# EAGLE board untitled (EAGLE 6.1)
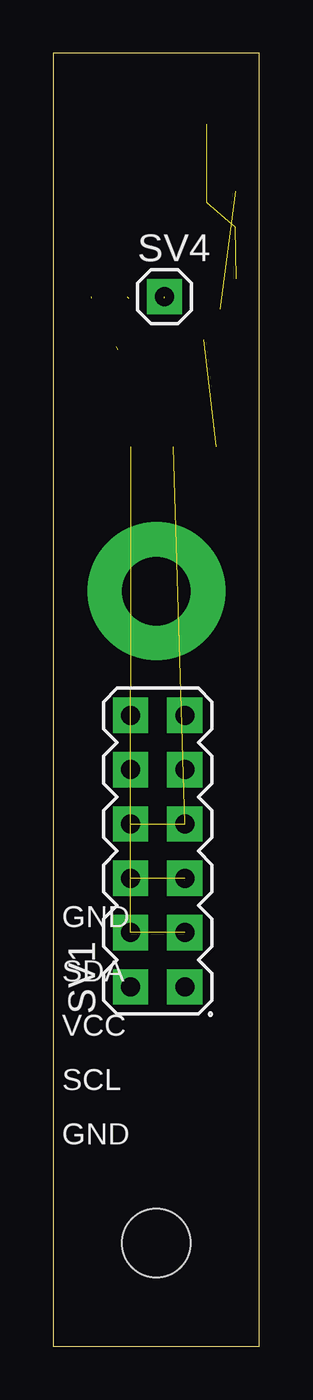
[diagram p0: board, top side]
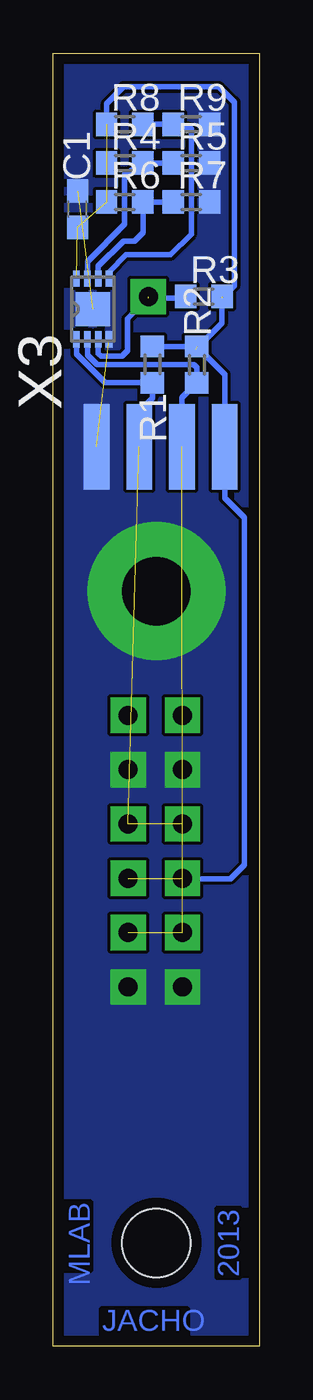
[diagram p1: board, bottom side, seen from below]

Size 9.65 x 60.45 mm. Coordinates in mm from the lower left corner, seen from the top.
Outline: 0,0 9.65,0 9.65,60.45 0,60.45 0,0
Copper layers (1*16): Top 0.035mm / dielectric 1.5mm / Bottom 0.035mm
Design rules: minimum track width 8mil, minimum drill 16mil, track to track 6mil, track to pad 6mil, pad to pad 6mil, via to via 6mil, smd to smd 6mil, copper to edge 20mil, drill to drill 8mil, minimum pad ring 10mil, minimum via ring 8mil, stop-mask expansion 4mil, vias tented up to drill 25mil, thermal gap 0mil
Holes 3.2 mm at 4.83,4.83

## Footprints (pad centres in the part's own frame; a part is rotated, then mirrored left to right if it is on the bottom)
C0603 = smd 1.1 x 1: 1 -0.85,0; 2 0.85,0
R0603 = smd 1 x 1.1: 1 -0.85,0; 2 0.85,0
MA06-2 = drill 0.889 pad 1.651 square: 1 -6.35,-1.27; 2 -6.35,1.27; 3 -3.81,-1.27; 4 -3.81,1.27; 5 -1.27,-1.27; 6 -1.27,1.27; 7 1.27,-1.27; 8 1.27,1.27; 9 3.81,-1.27; 10 3.81,1.27; 11 6.35,-1.27; 12 6.35,1.27
SMD_MA04-1 = smd 4 x 1.2: 1 0,3; 2 0,1; 3 0,-1; 4 0,-3
MA01-1 = drill 0.889 pad 1.651 square: 1 0,0
SROUB3M = drill 3.2 pad 6.452: P$1 0,0
TDFN8 = smd 0.762 x 0.305: 1 -1.422,0.762; 2 -1.422,0.254; 3 -1.422,-0.254; 4 -1.422,-0.762; 5 1.422,-0.762; 6 1.422,-0.254; 7 1.422,0.254; 8 1.422,0.762 | smd 1.6 x 1.6: 9 0,0

## Placement (x,y rotation side)
C1  100nF  [C0603]  8.52,53.17 90 bottom
R1  10k  [R0603]  5.01,45.9 90 bottom
R2  10k  [R0603]  2.93,45.9 90 bottom
R3  10k  [R0603]  2.61,49.08 0 bottom
R4  0R  [R0603]  6.31,55.32 0 bottom
R5  0R  [R0603]  3.19,55.32 0 bottom
R6  0R  [R0603]  6.31,53.5 0 bottom
R7  0R  [R0603]  3.19,53.5 0 bottom
R8  0R  [R0603]  6.31,57.14 0 bottom
R9  0R  [R0603]  3.19,57.14 0 bottom
SV1  [MA06-2]  4.88,23.15 90 top
SV2  [SMD_MA04-1]  4.63,42.06 270 bottom
SV4  [MA01-1]  5.21,49.08 0 top
X2  SROUB3M  [SROUB3M]  4.83,35.31 0 top
X3  [TDFN8]  7.81,48.5 90 bottom

## Library data of the parts
C1 R1-R9 = rcl
SV1 = moje_hrebinky; OC_FARNELL: unknown; OC_NEWARK: unknown
SV2 SV4 = moje_hrebinky
X2 = moje
X3 = moje_io

## Nets
A0: R4.2 R5.1 X3.7
A1: R6.2 R7.1 X3.6
A2: R8.2 R9.1 X3.5
GND: C1.2 R5.2 R7.2 R9.2 SV1.1 SV1.2 SV1.9 SV1.10 SV2.4 X2.P$1 X3.4 X3.9
OS: R3.1 SV4.1 X3.3
SCL: R2.1 SV1.3 SV1.4 SV2.2 X3.2
SDA: R1.1 SV1.7 SV1.8 SV2.3 X3.1
VCC: C1.1 R1.2 R2.2 R3.2 R4.1 R6.1 R8.1 SV1.5 SV1.6 SV2.1 X3.8

## Tracks (layer width: path | path; a pad name or v marks a point on that pad's centre or on a via)
A0
  Bottom 0.254: X3.7 8.06,50.71 6.31,52.46 6.31,54.8 R4.2 R5.1
A1
  Bottom 0.254: X3.6 7.55,50.51 6.38,51.68 5.86,51.68 5.47,52.07 5.47,53.31 5.34,53.44 5.4,53.5 | 5.4,53.5 R7.1 | R6.2 5.4,53.5
A2
  Bottom 0.254: X3.5 7.04,50.23 6.25,51.03 4.17,51.03 3.19,52.01 3.19,56.94 R9.1 R8.2
GND  (2 unrouted)
  pour Bottom: 0.01,68.3 10.17,68.3 9.91,-0.25 -0.25,-0.25
OS  (2 unrouted)
  Bottom 0.254: X3.3 7.55,46.42 7.42,46.29 6.44,46.29 6.18,46.55 6.18,48.04 5.21,49.02 3.52,49.02
SCL  (2 unrouted)
  Bottom 0.254: X3.2 8.06,46.34 7.61,45.9 3.06,45.9 2.93,45.77 R2.1 | R2.1 | R2.1 | SV2.2 3.63,44.35 R2.1 | R2.1 2.93,44.99
SDA  (2 unrouted)
  Bottom 0.254: X3.1 8.57,46.4 7.22,45.05 R1.1 | R1.1 | R1.1 5.01,44.33 5.79,43.56 5.79,42.22 SV2.3
VCC  (7 unrouted)
  Bottom 0.254: R8.1 7.16,58.11 6.38,58.9 1.89,58.9 1.18,58.18 1.18,49.6 1.76,49.02 1.76,47.85 3,46.61 | R1.2 R2.2 1.63,45.44 SV2.1 1.63,39.66 0.72,38.75 0.72,22.5 1.37,21.85 3.58,21.85 SV1.6

## Text on the board
Bottom: 2013 | MLAB | JACHO
tPlace: 2013 | SHT25V01A | MLAB | GND | SDA | VCC | SCL | GND